# Altium PCB PC-104 16 bit bus.PCBDOC
Units mm, origin at the board's own origin, x right, y up, seen from the top; angles counter-clockwise.
Board outline 90.17 x 95.88 mm, 10 copper layers (TopLayer, MidLayer1, MidLayer2, MidLayer3, MidLayer4, MidLayer5, MidLayer6, MidLayer7, MidLayer8, BottomLayer); 2 components, 1 nets, 108 pads, 0 vias.
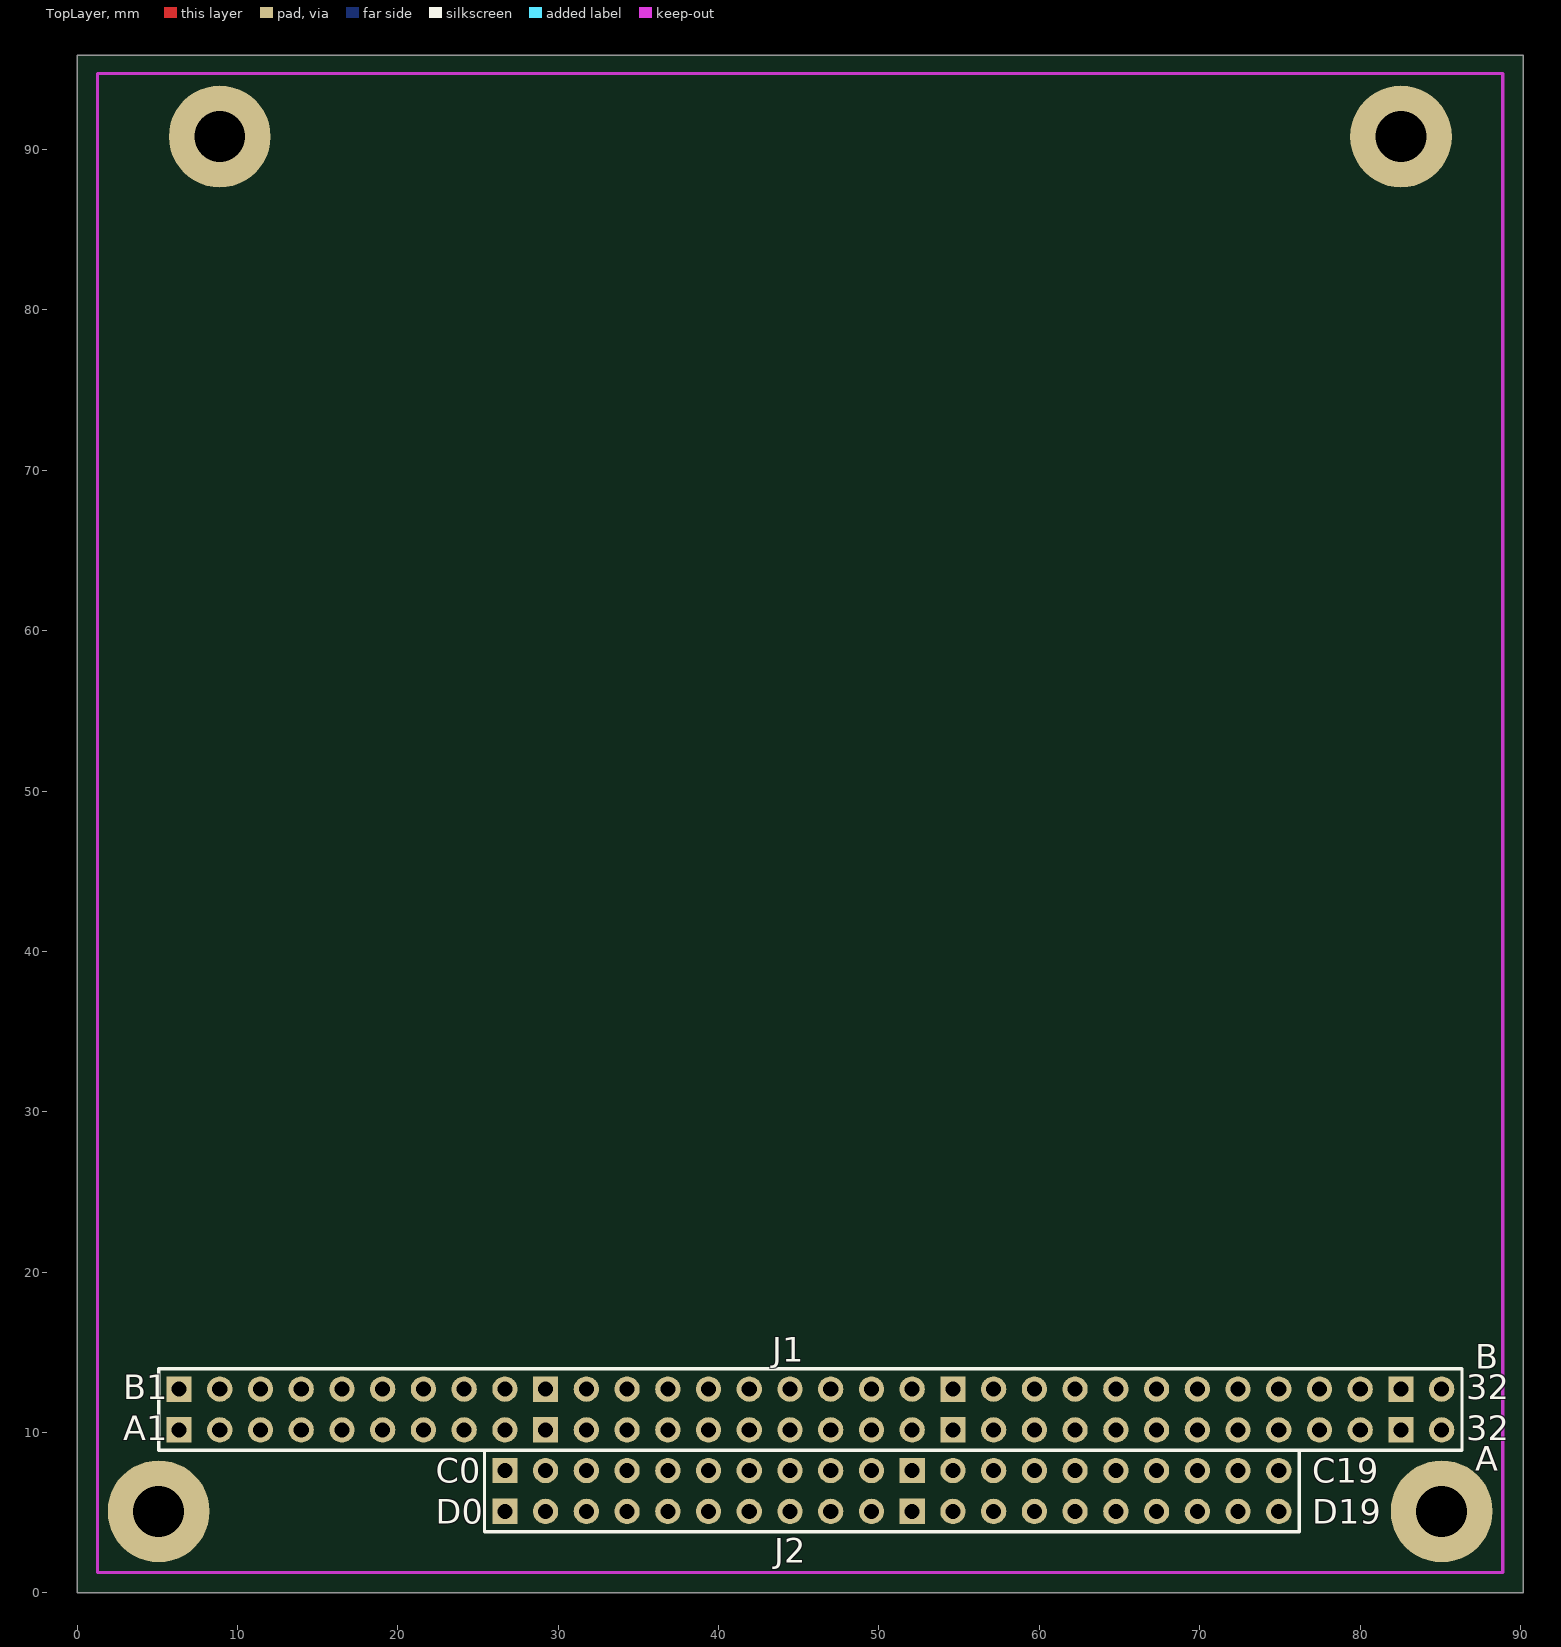
[diagram p0: TopLayer view]
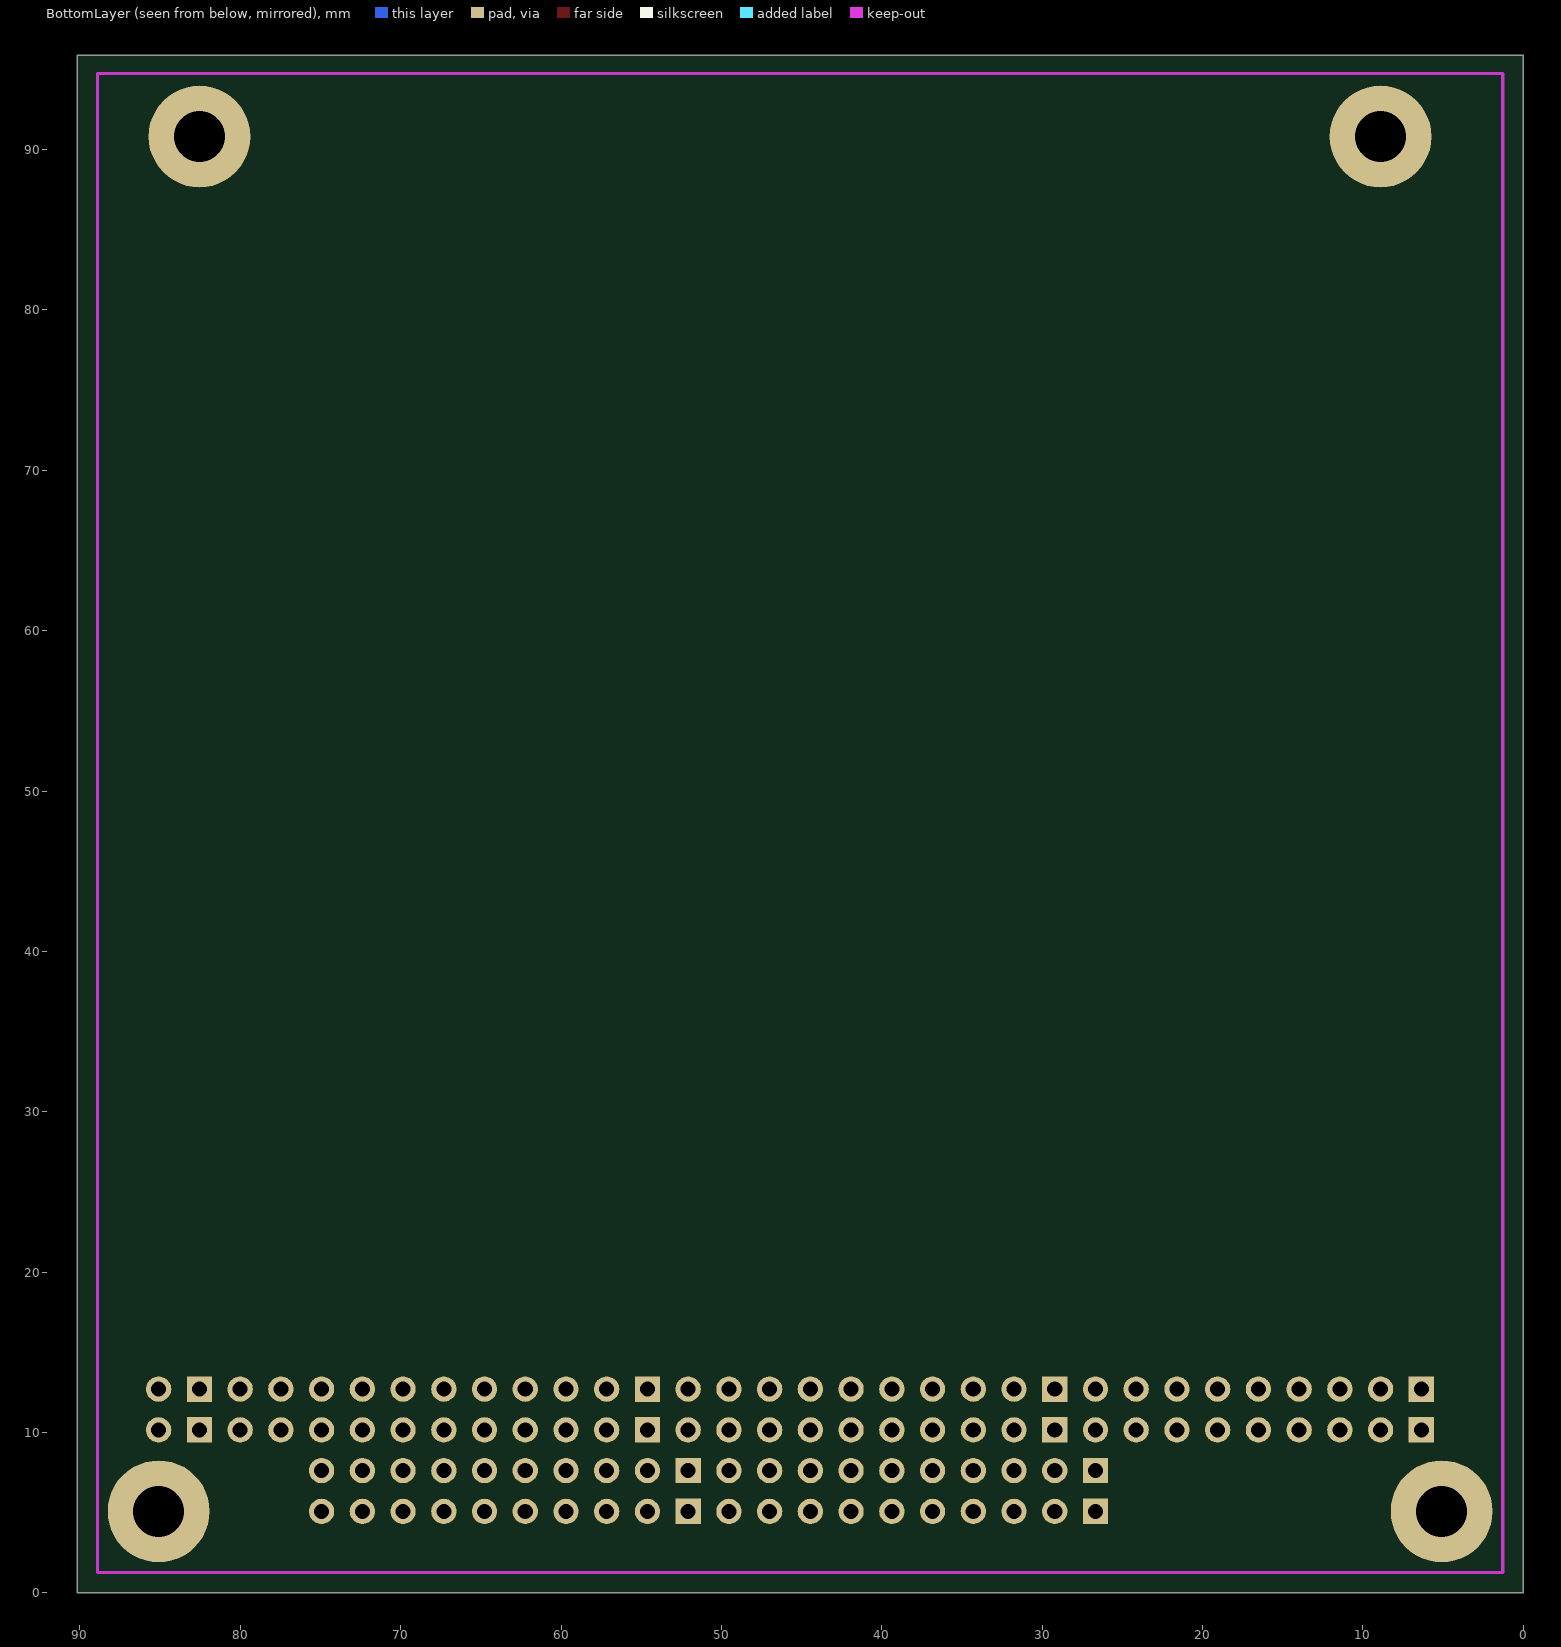
[diagram p1: BottomLayer view, seen from below]
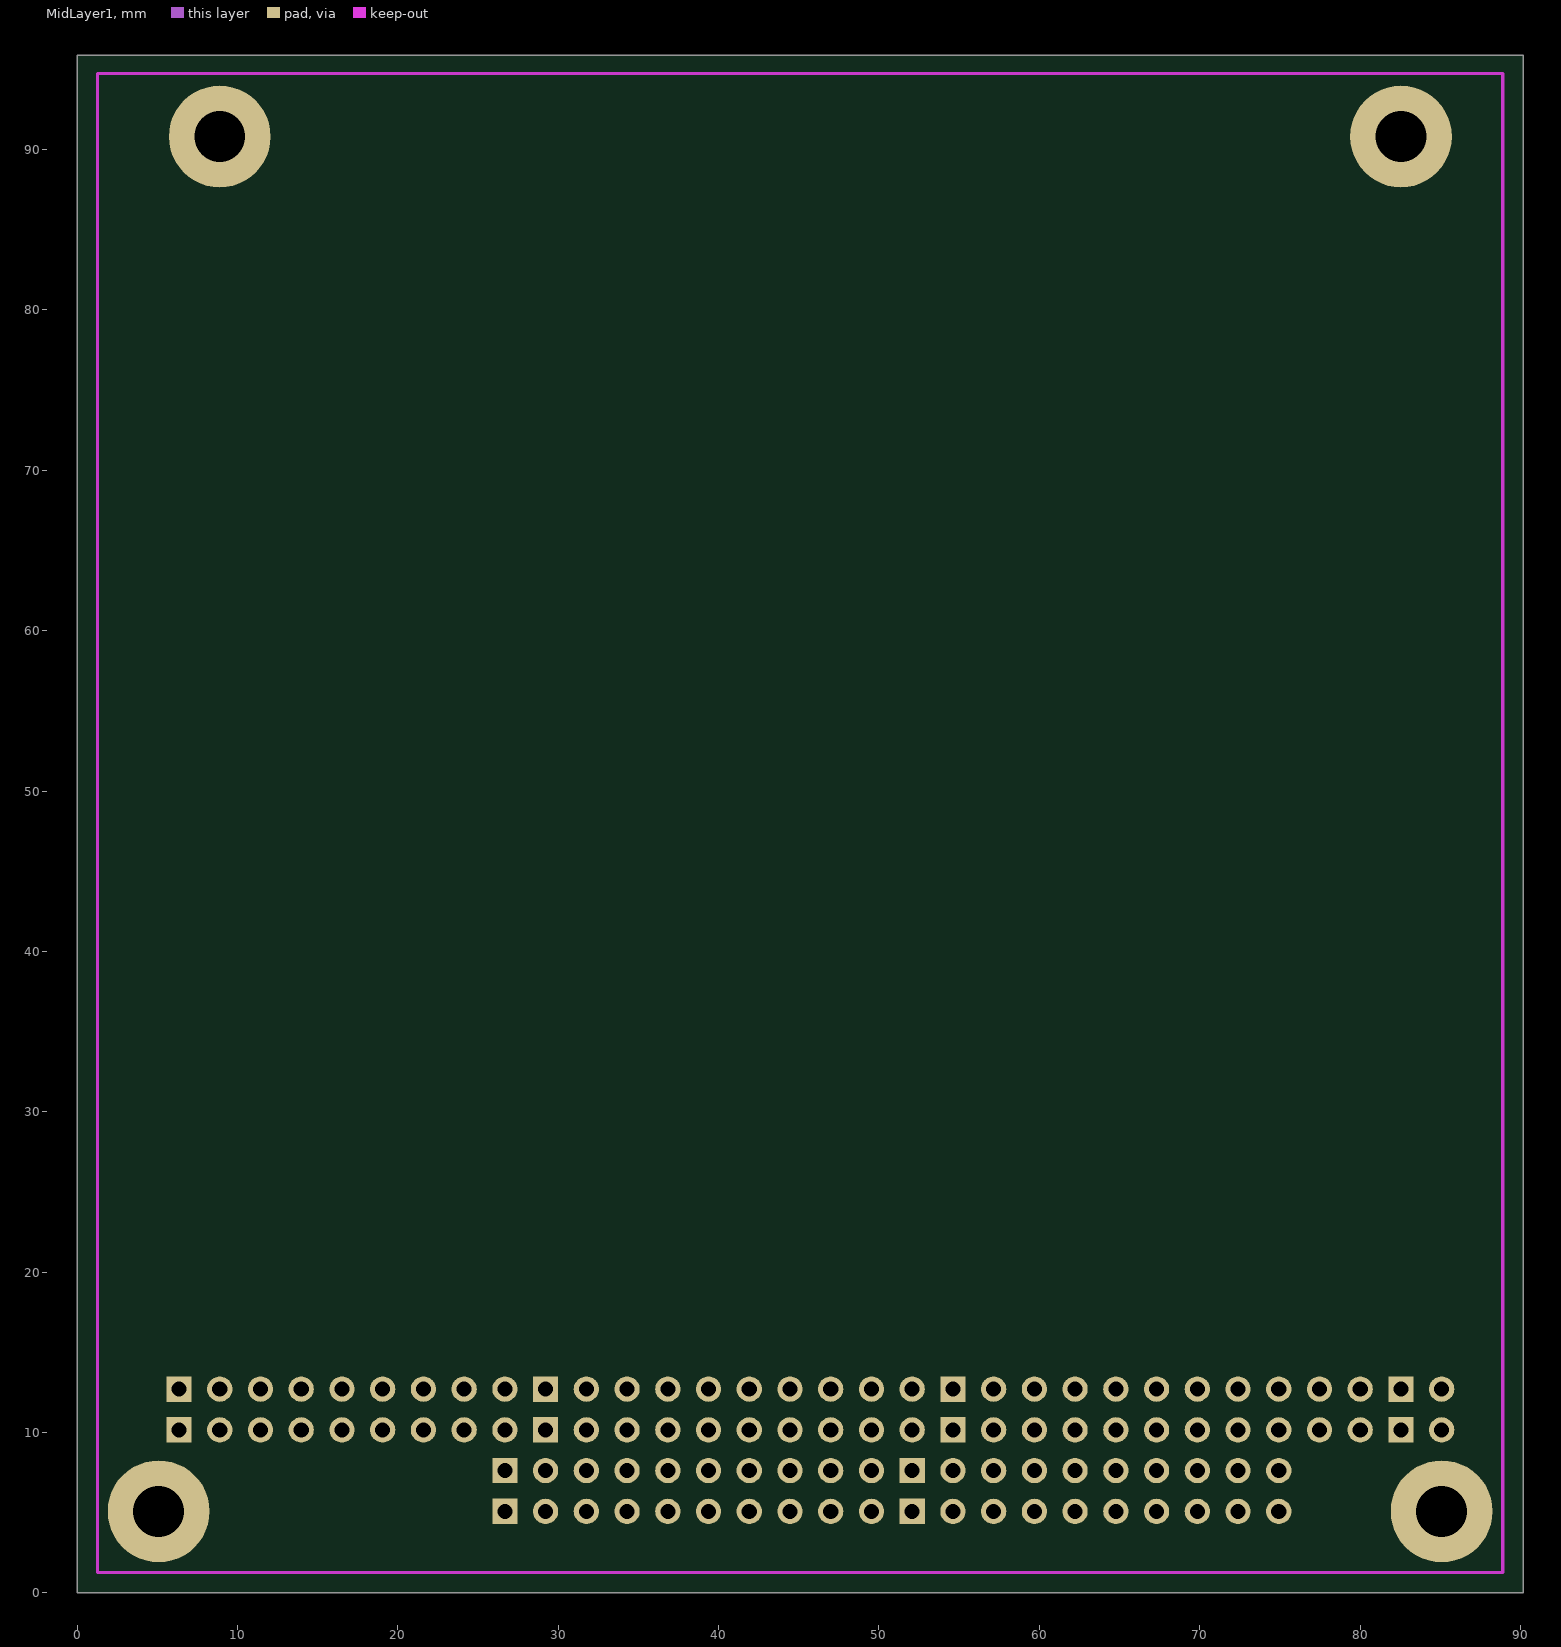
[diagram p2: MidLayer1]
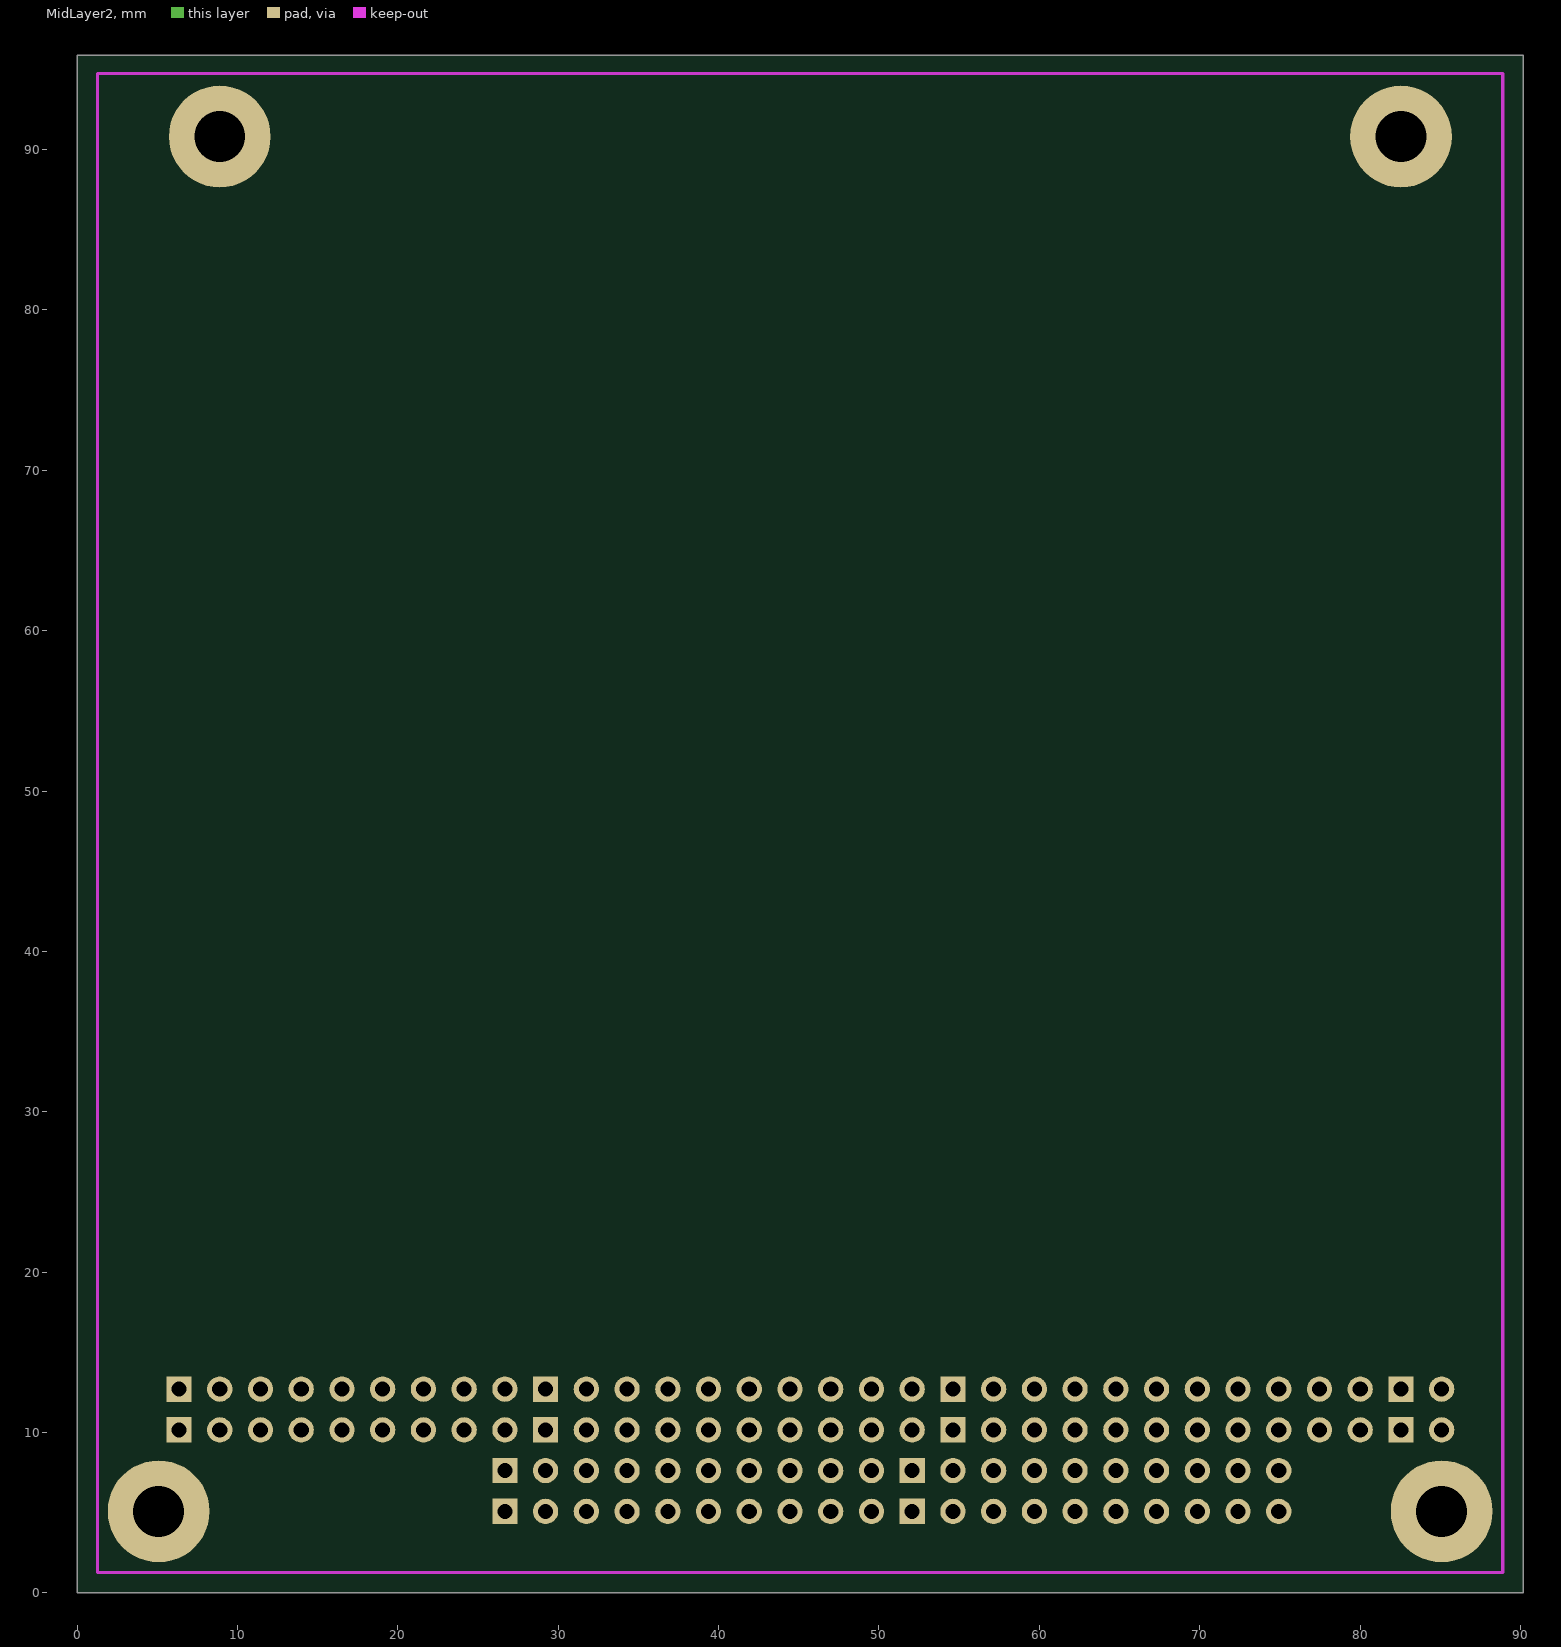
[diagram p3: MidLayer2]
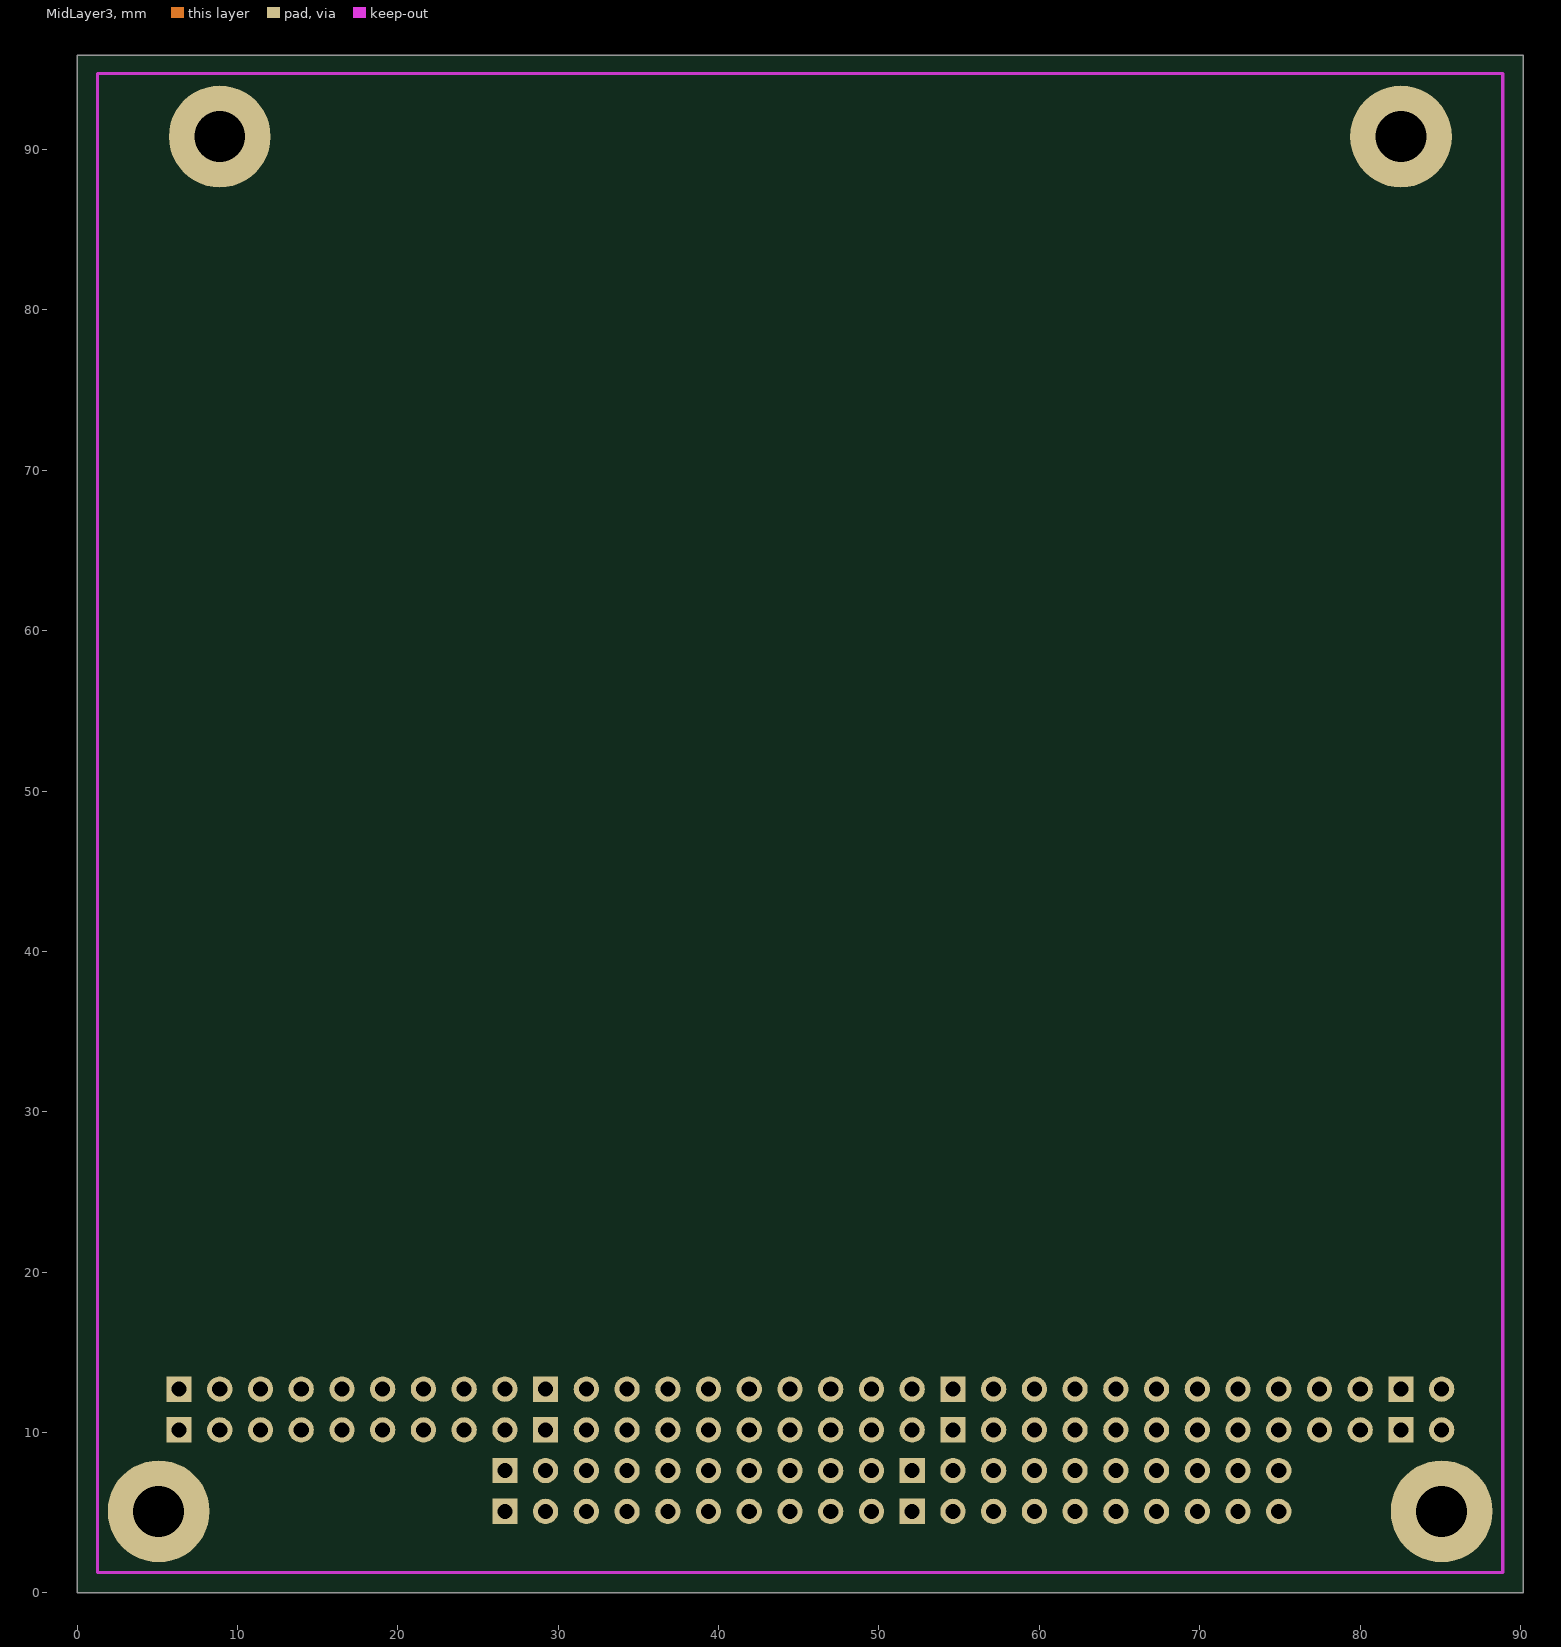
[diagram p4: MidLayer3]
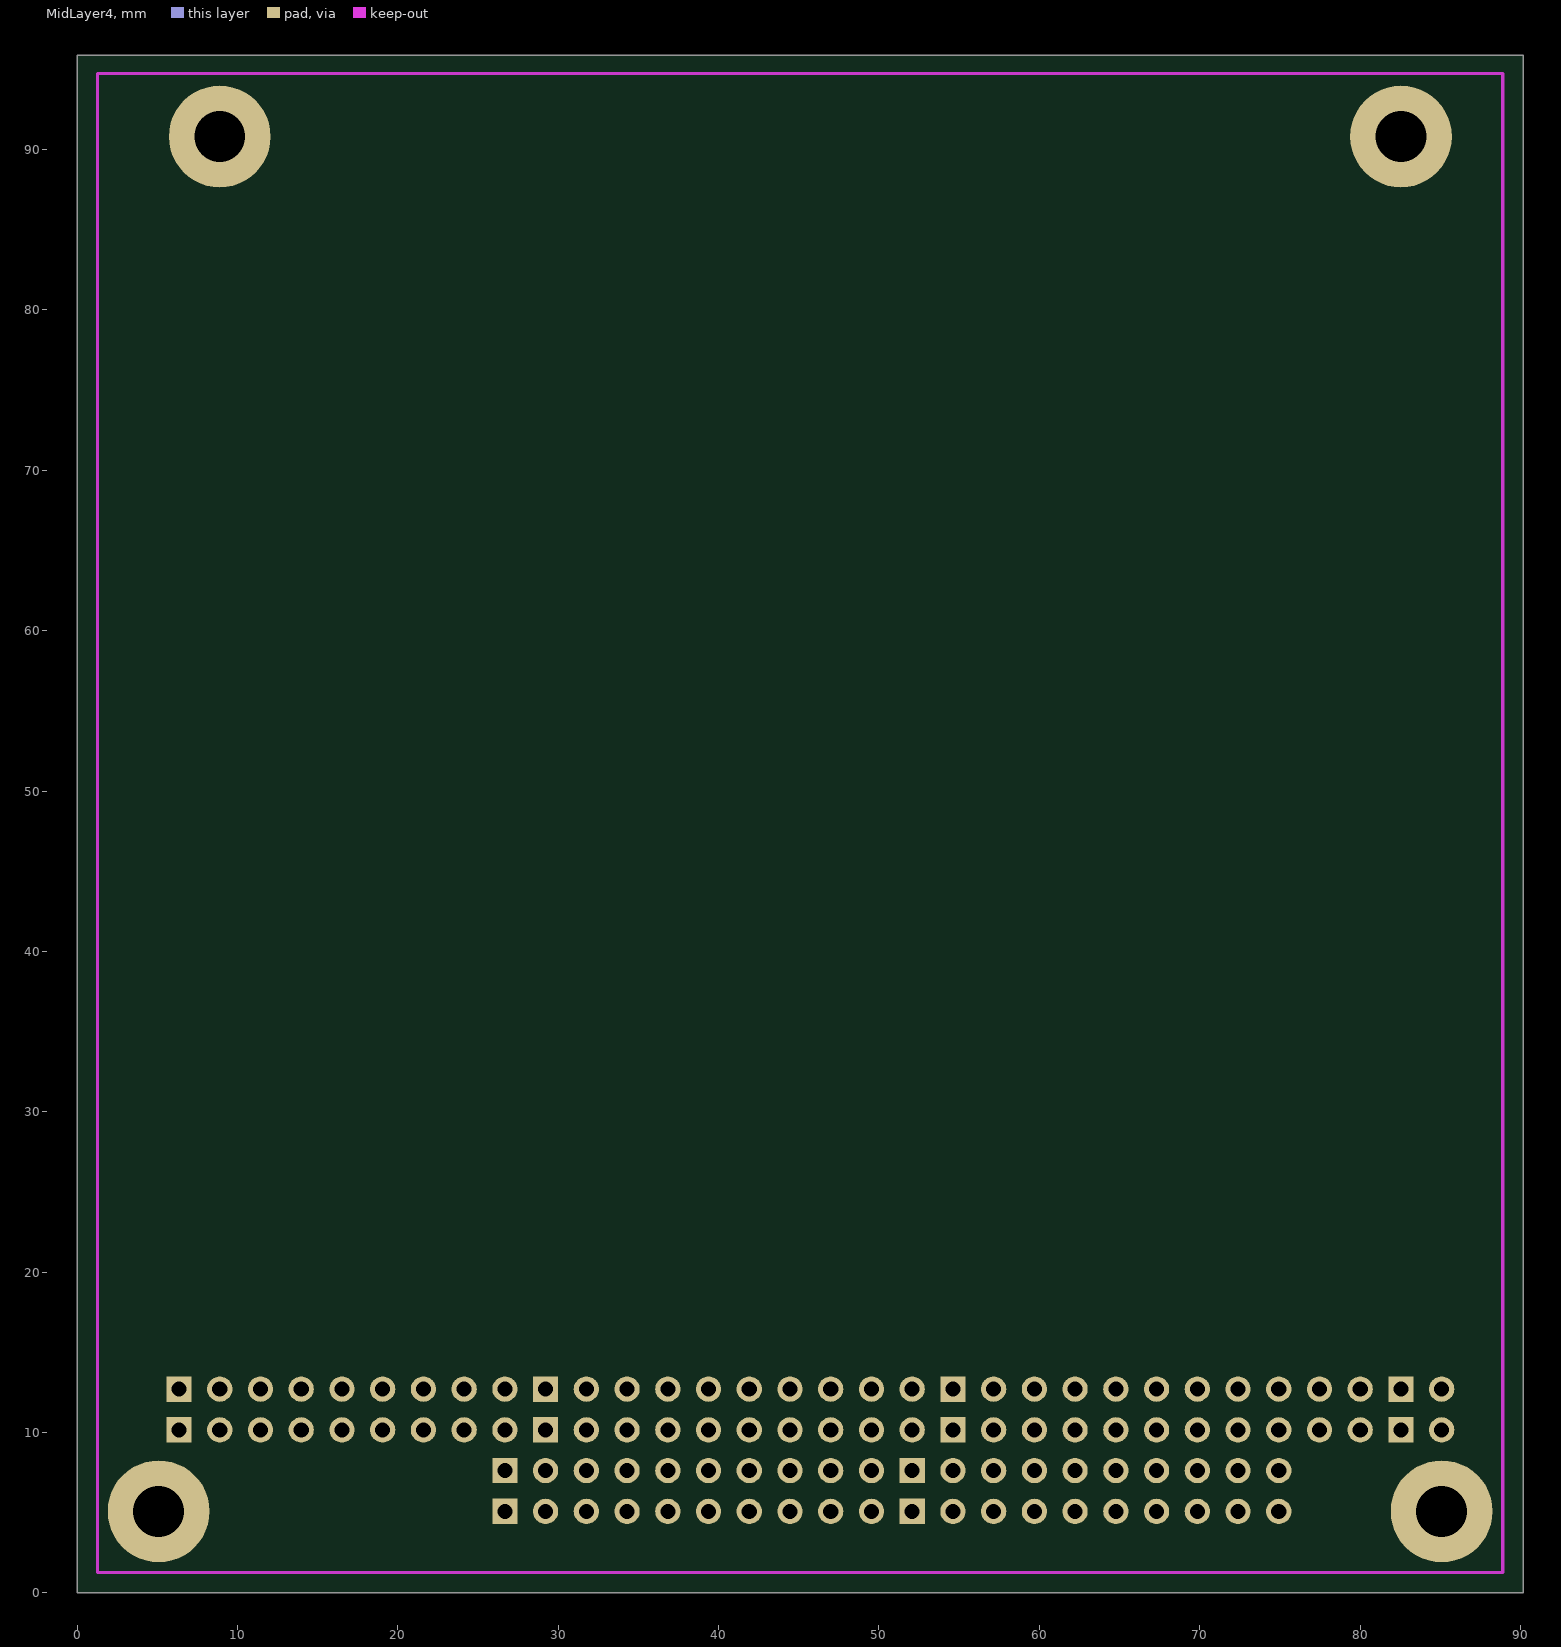
[diagram p5: MidLayer4]
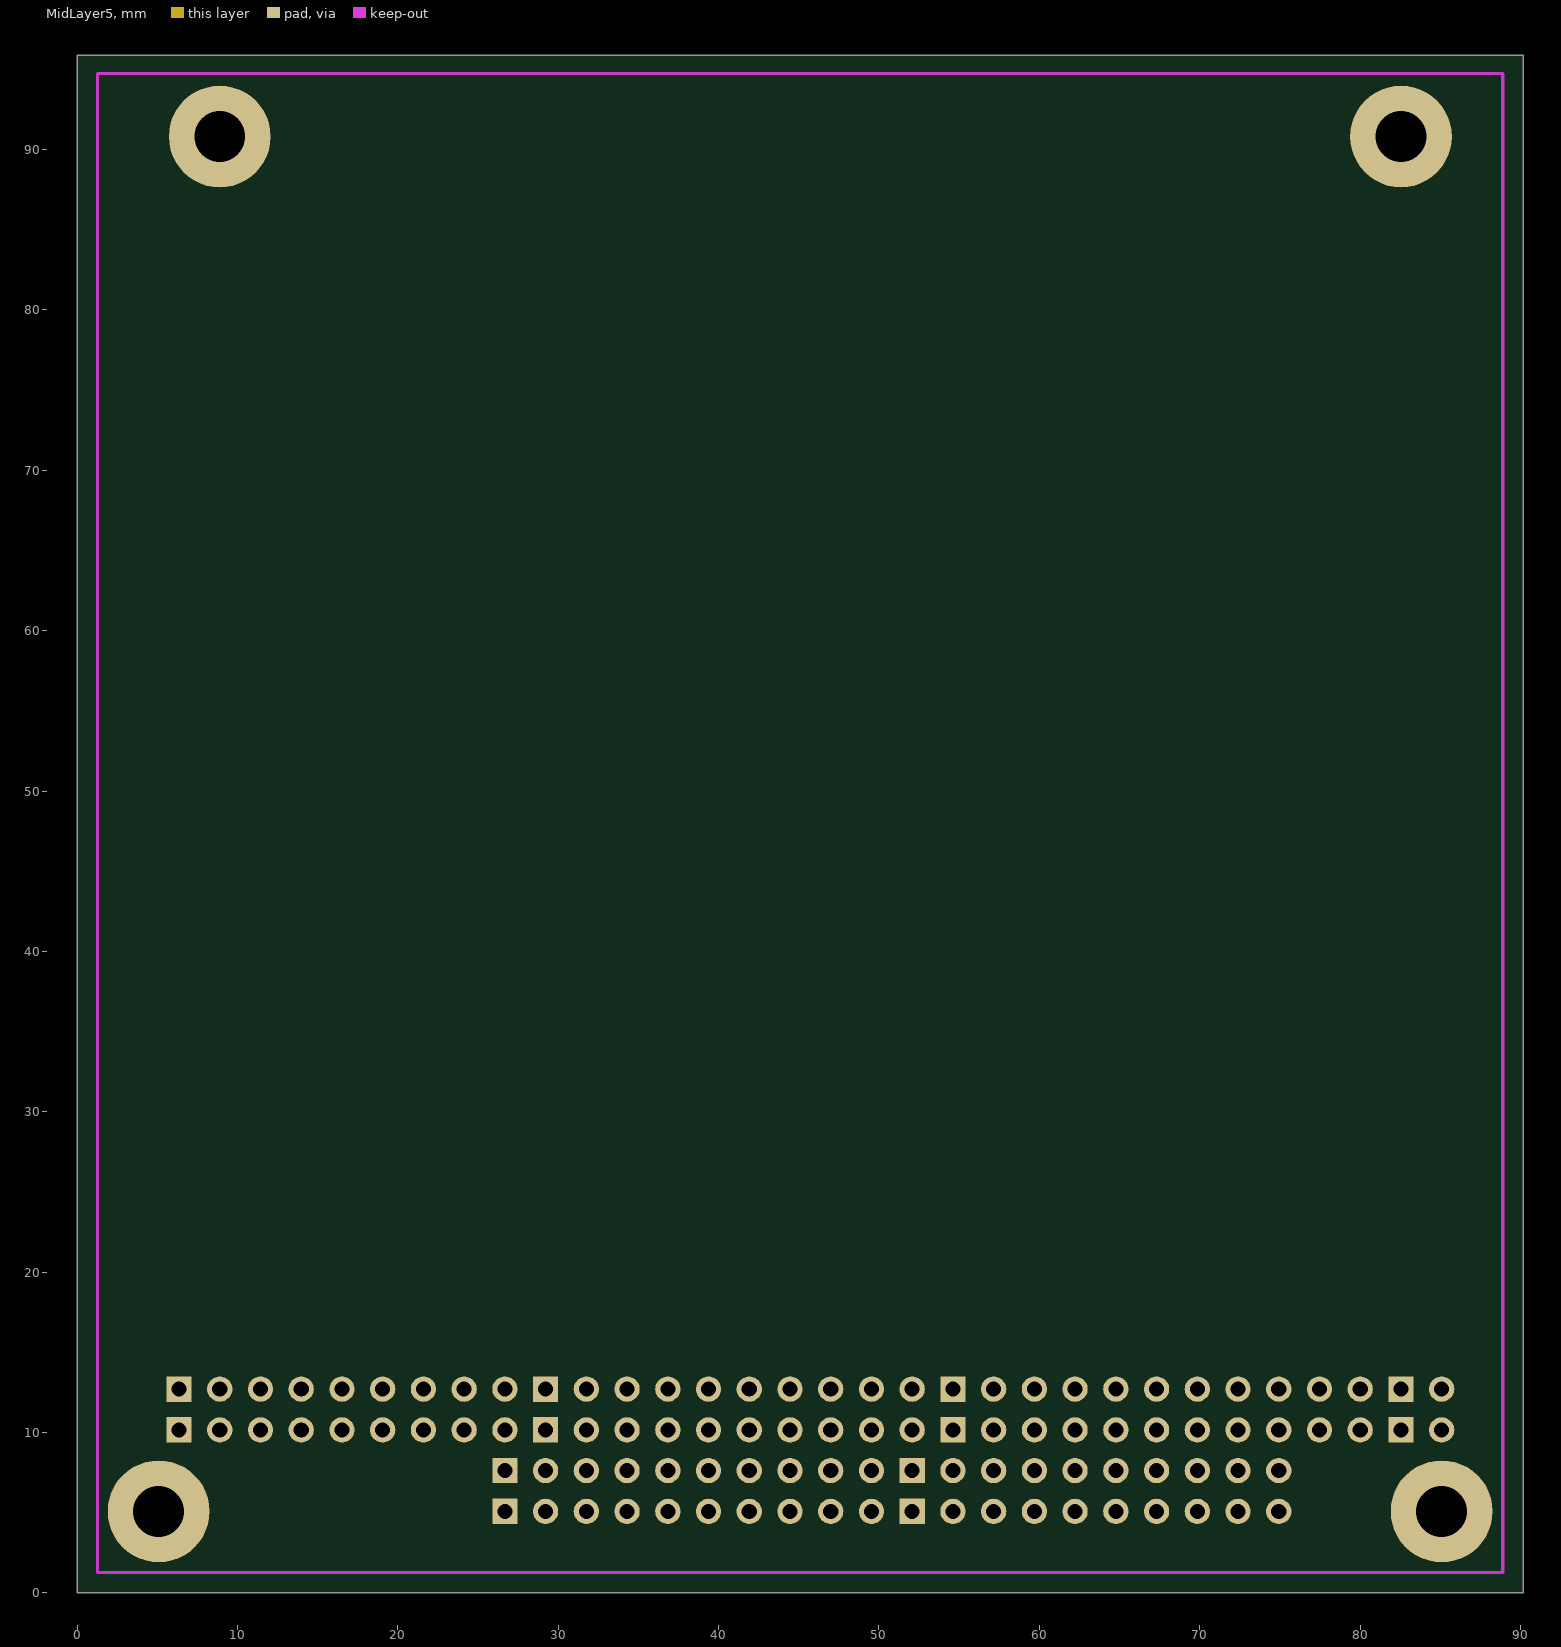
[diagram p6: MidLayer5]
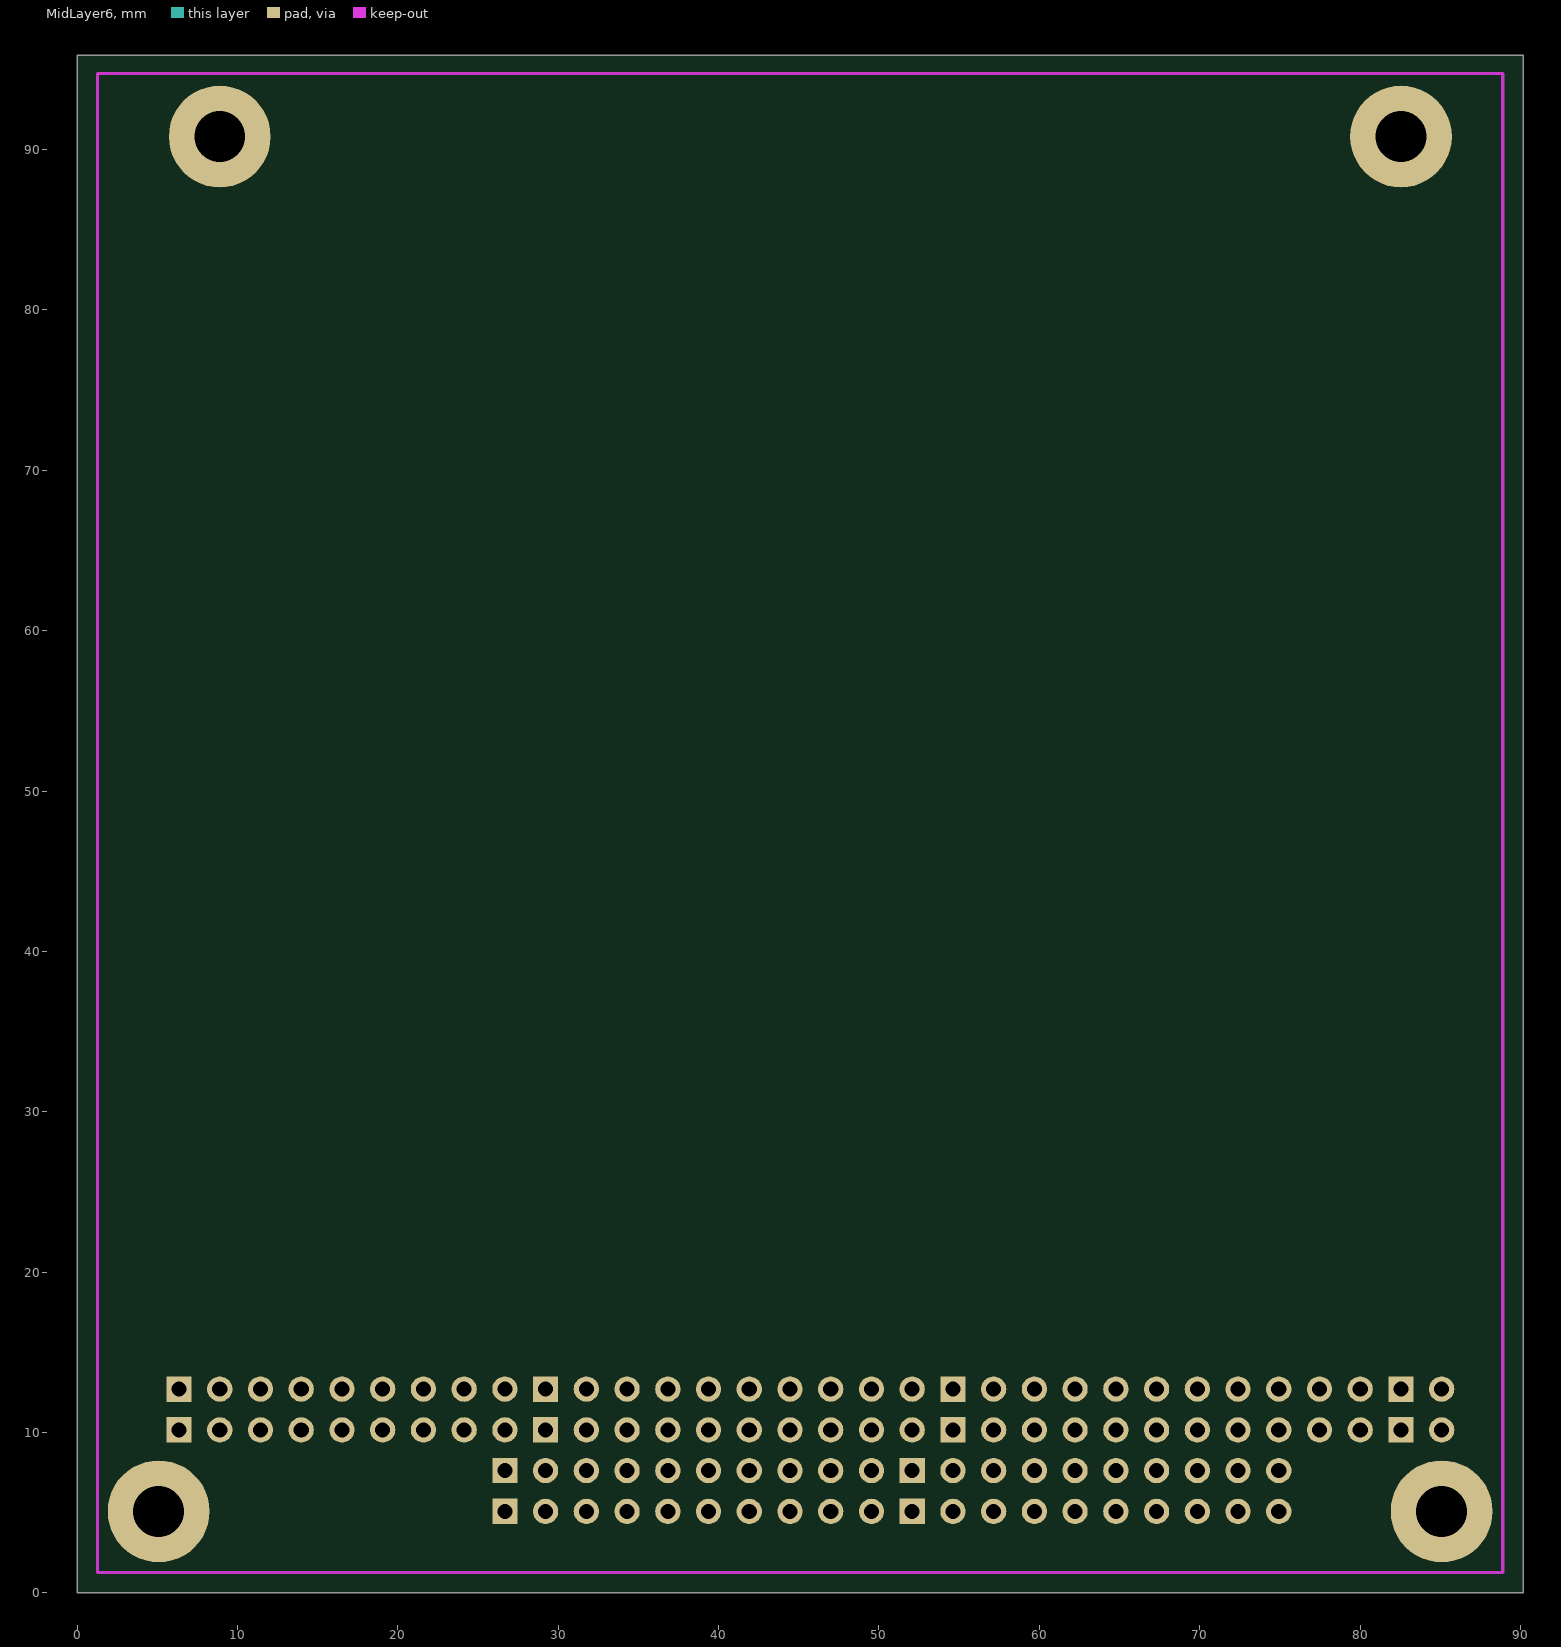
[diagram p7: MidLayer6]
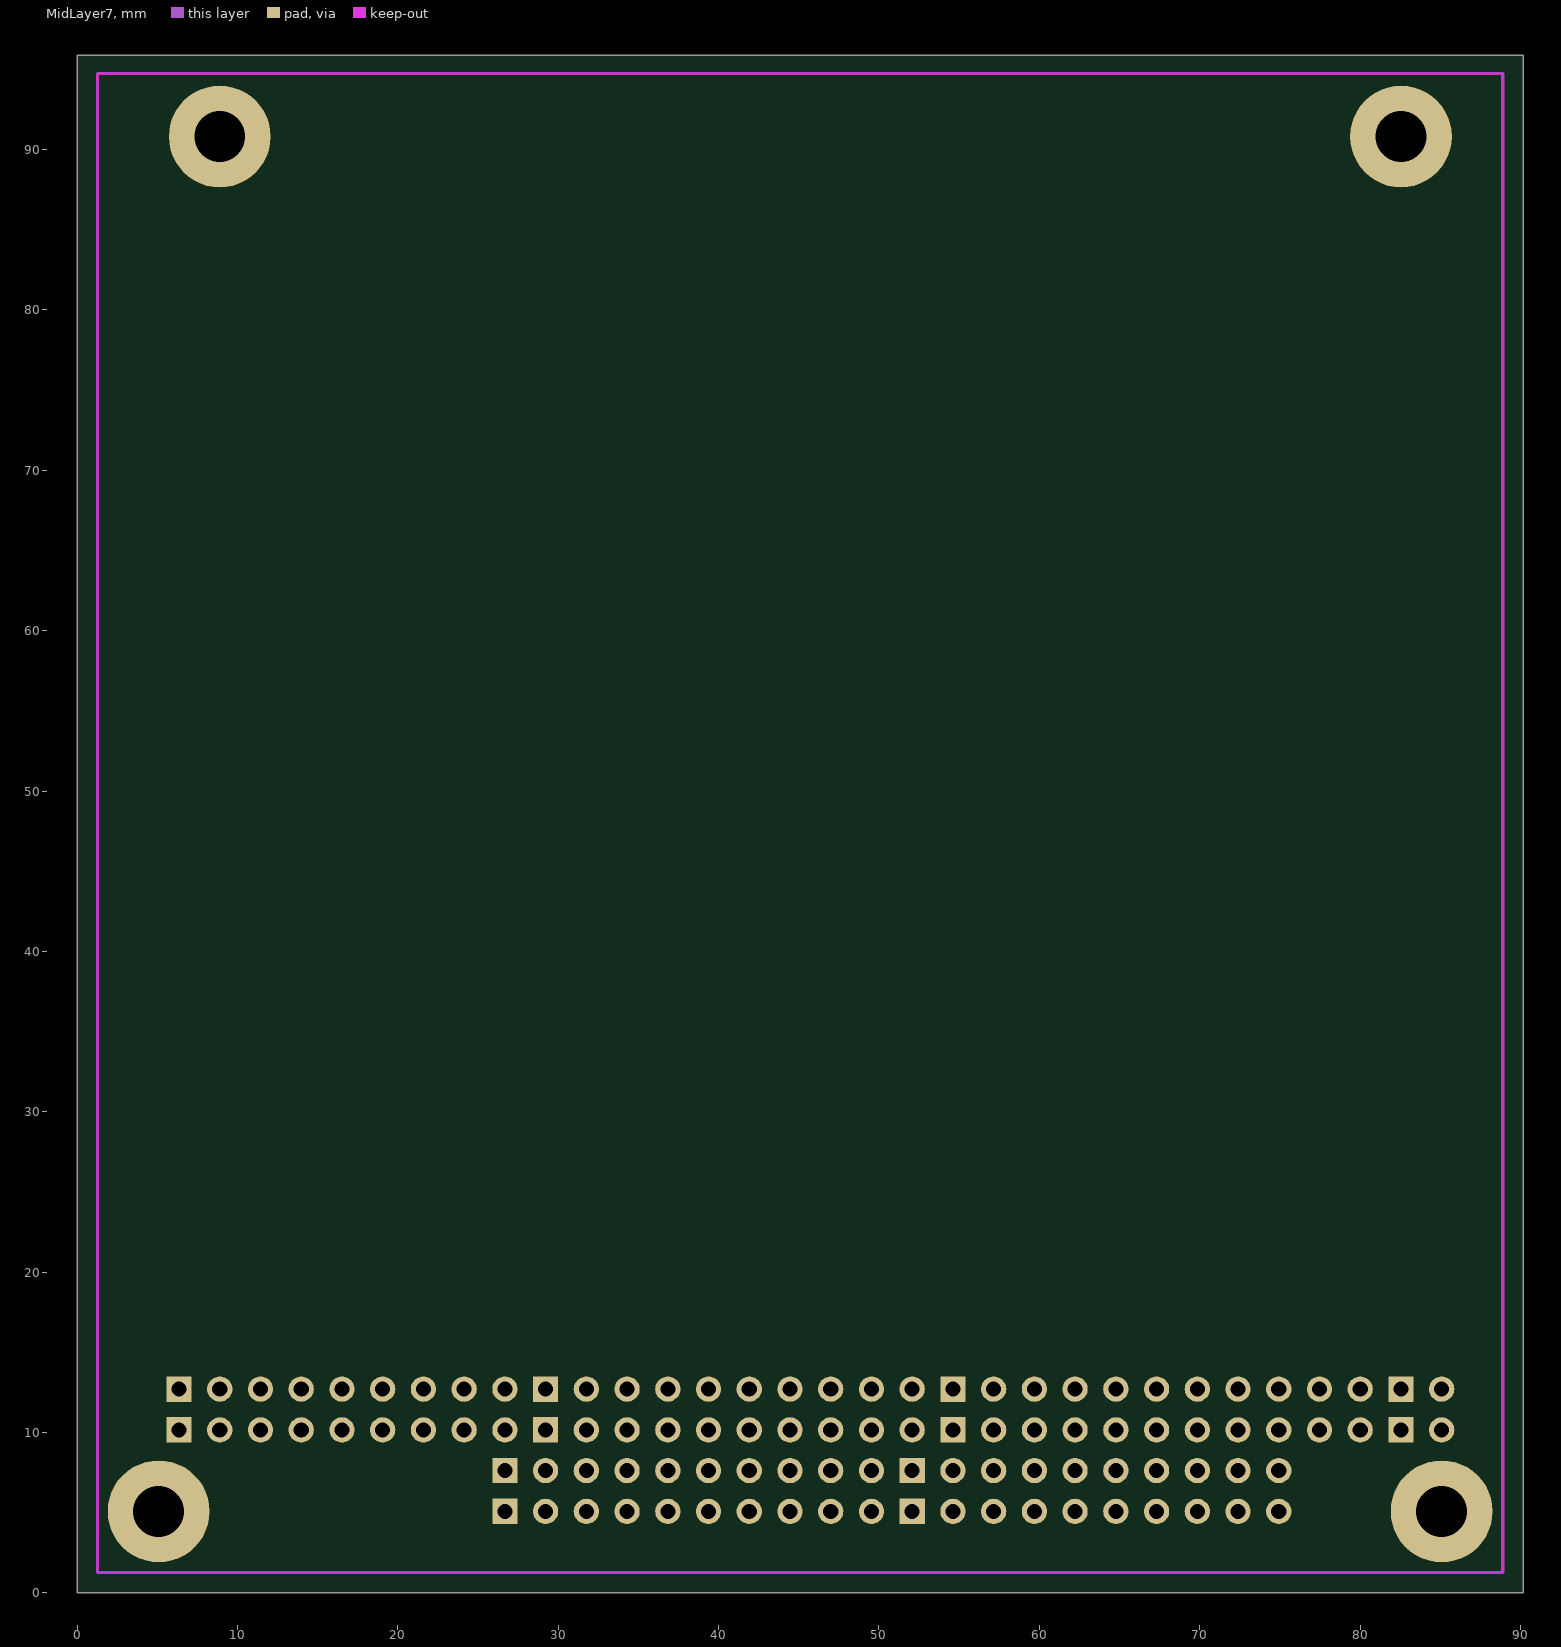
[diagram p8: MidLayer7]
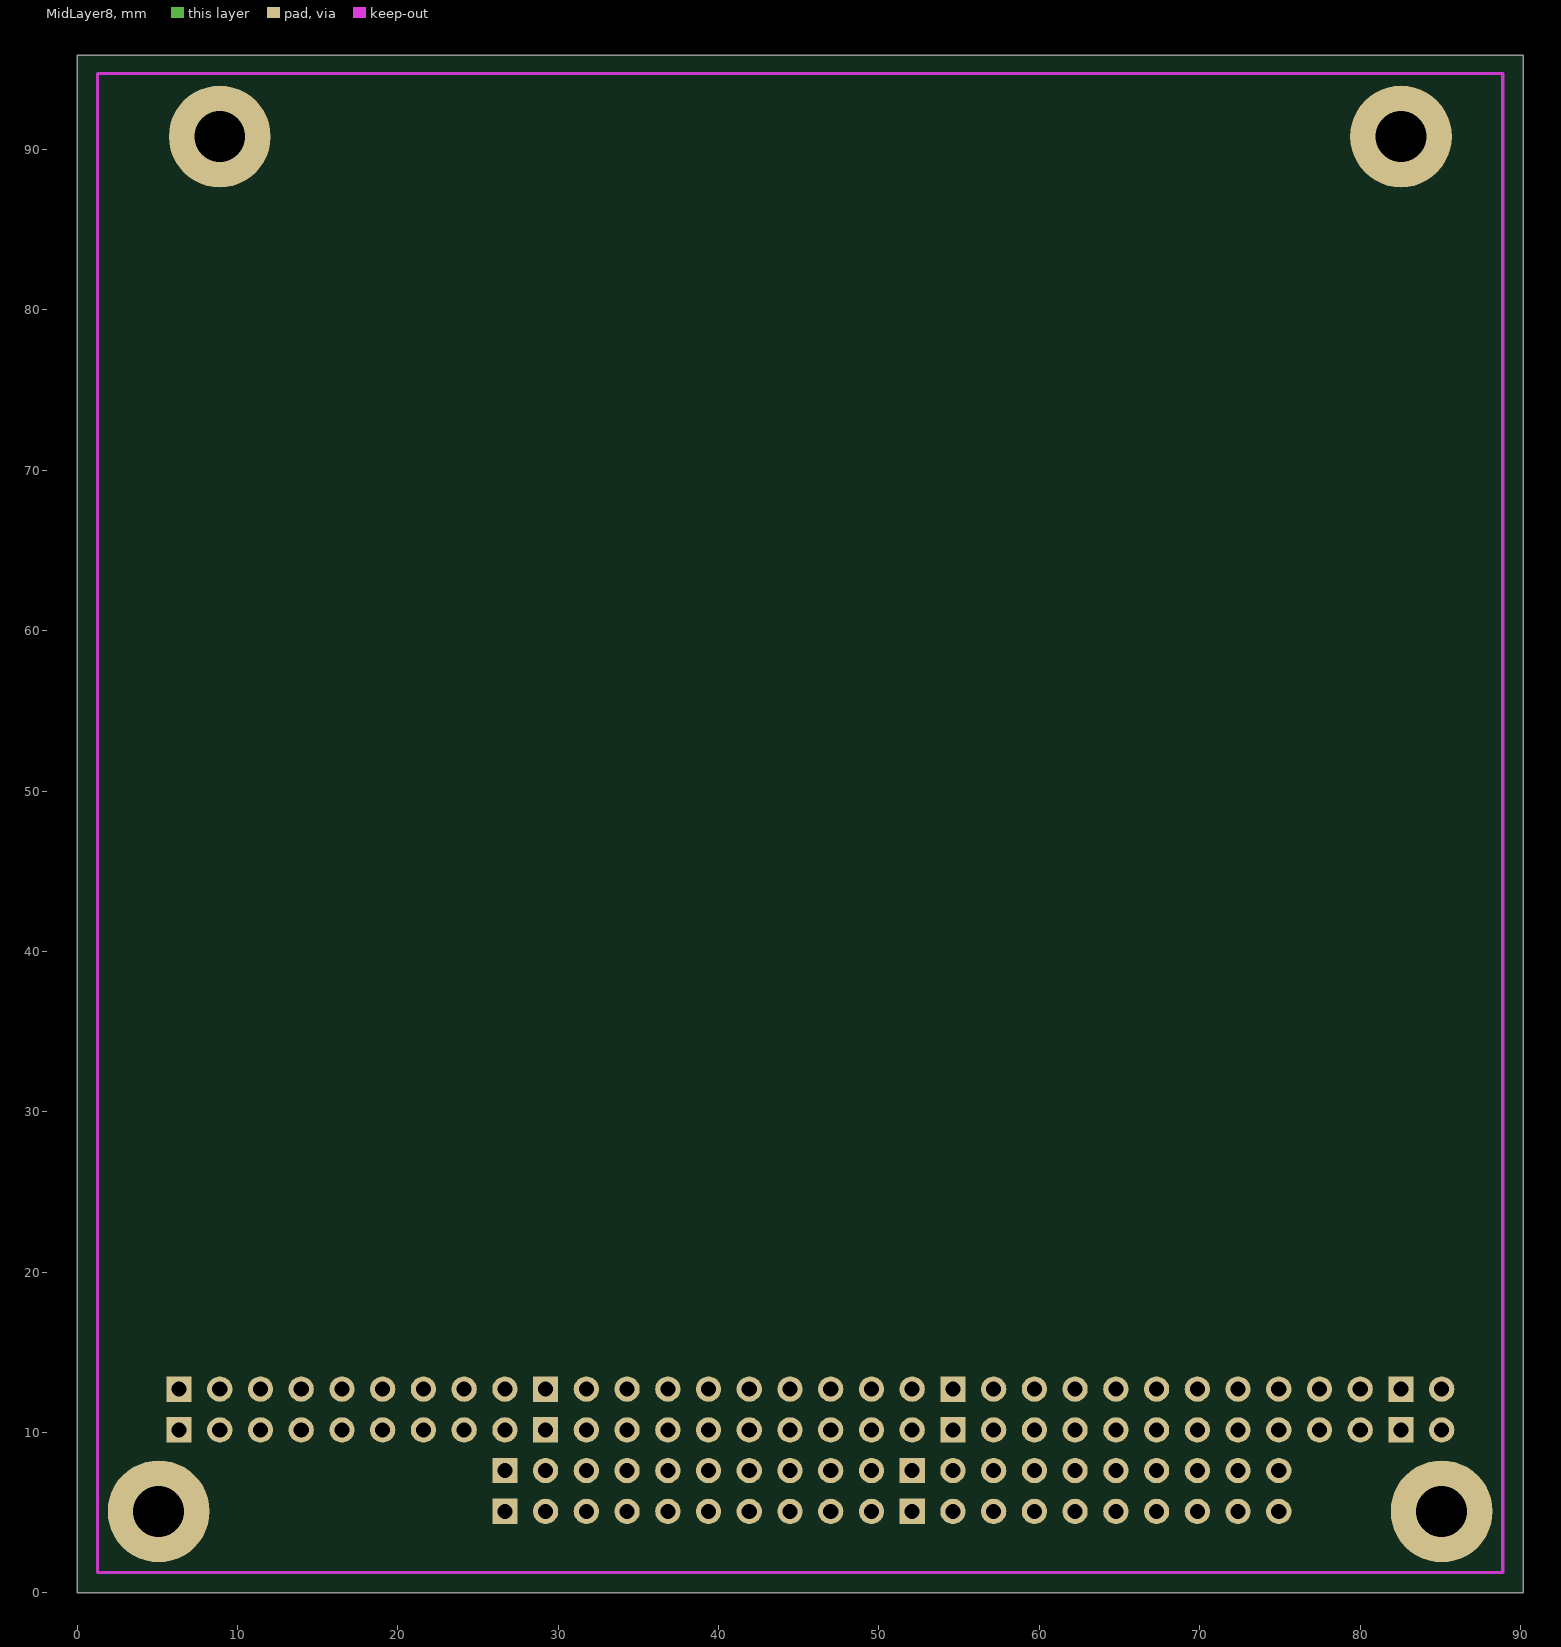
[diagram p9: MidLayer8]

## Layer stack, top to bottom
TopSolder: solder mask 0.0102, Solder Resist, Dk 3.5
TopLayer: signal copper 0.0356
Dielectric1: core 0.32, FR-4, Dk 4.8
MidLayer1: signal copper 0.0356
Dielectric2: prepreg 0.32, FR-4, Dk 4.8
MidLayer2: signal copper 0.0356
Dielectric3: core 0.32, FR-4, Dk 4.8
MidLayer3: signal copper 0.0356
Dielectric4: prepreg 0.32, FR-4, Dk 4.8
MidLayer4: signal copper 0.0356
Dielectric5: core 0.32, FR-4, Dk 4.8
MidLayer5: signal copper 0.0356
Dielectric6: prepreg 0.32, FR-4, Dk 4.8
MidLayer6: signal copper 0.0356
Dielectric7: core 0.32, FR-4, Dk 4.8
MidLayer7: signal copper 0.0356
Dielectric8: prepreg 0.32, FR-4, Dk 4.8
MidLayer8: signal copper 0.0356
Dielectric9: core 0.32, FR-4, Dk 4.8
BottomLayer: signal copper 0.0356
BottomSolder: solder mask 0.0102, Solder Resist, Dk 3.5

## Board outline
0,0 90.17,0 90.17,95.885 0,95.885

## Design rules (kind name [scope] priority, off if disabled: settings)
Clearance [All] p1: gap=0.254
FabricationTestPointUsage TestPointUsage [All] p1: valid=0 allowmultiple=FALSE
FabricationTestpoint Testpoint [All] p1: side=3 testpointundercomponent=TRUE minsize=1.016 maxsize=2.54 preferedsize=1.524 minholesize=0.508 maxholesize=1.016 preferedholesize=0.813 testpointgrid=0.025 allowsidetop=TRUE allowsidebottom=TRUE usegrid=TRUE gridtolerance=0
PlaneClearance [All] p1: clearance=0
PolygonConnect [All] p1: connectstyle=Relief reliefconductorwidth=0.254 reliefentries=4 polygonreliefangle="90 Angle" airgapwidth=0.254
RoutingVias [All] p1: holewidth=0.508 width=1.27 viastyle="Through Hole" minholewidth=0.711 minwidth=1.27 maxholewidth=0.711 maxwidth=1.27
SilkToSolderMaskClearance SilkscreenOverComponentPads [IsPad] p1: minsilkscreentomaskgap=0.254 clearancetoexposedcopper=TRUE
SolderMaskExpansion [All] p1: expansion=0.102
Width [All] p1: maxlimit=0.254 minlimit=0.254 preferedwidth=0.254
25 further rules are at their usual default settings.

## Components (designator, comment, footprint, x,y, rotation, side; value= is the part's Value field where it differs from the comment)
J1 "" PC104AB 6.35,10.16 r0 top locked
J2 "" PC104CD 26.67,7.62 r0 top locked

## Footprints (in the part's own frame and the unit in brackets; to place one, negate y for a bottom-side part, rotate by r counter-clockwise, add the part's x,y. Pads: shape width x height; smd on the part's side, far side on the other; paste and mask are expansions set on the pad)
PC104AB [mil]
  rect 62x62 hole 37: A1(0,0) A10(900,0) A20(1900,0) A31(3000,0) B1(0,100) B10(900,100) B20(1900,100) B31(3000,100)
  round 62 hole 37: A2(100,0) A3(200,0) A4(300,0) A5(400,0) A6(500,0) A7(600,0) A8(700,0) A9(800,0) A11(1000,0) A12(1100,0) A13(1200,0) A14(1300,0) A15(1400,0) A16(1500,0) A17(1600,0) A18(1700,0) A19(1800,0) A21(2000,0) A22(2100,0) A23(2200,0) A24(2300,0) A25(2400,0) A26(2500,0) A27(2600,0) A28(2700,0) A29(2800,0) A30(2900,0) A32(3100,0) B2(100,100) B3(200,100) B4(300,100) B5(400,100) B6(500,100) B7(600,100) B8(700,100) B9(800,100) B11(1000,100) B12(1100,100) B13(1200,100) B14(1300,100) B15(1400,100) B16(1500,100) B17(1600,100) B18(1700,100) B19(1800,100) B21(2000,100) B22(2100,100) B23(2200,100) B24(2300,100) B25(2400,100) B26(2500,100) B27(2600,100) B28(2700,100) B29(2800,100) B30(2900,100) B32(3100,100)
  silkscreen extent -50,-50 3150,150
PC104CD [mil]
  rect 62x62 hole 37: C0(0,0) C10(1000,0) D0(0,-100) D10(1000,-100)
  round 62 hole 37: C1(100,0) C2(200,0) C3(300,0) C4(400,0) C5(500,0) C6(600,0) C7(700,0) C8(800,0) C9(900,0) C11(1100,0) C12(1200,0) C13(1300,0) C14(1400,0) C15(1500,0) C16(1600,0) C17(1700,0) C18(1800,0) C19(1900,0) D1(100,-100) D2(200,-100) D3(300,-100) D4(400,-100) D5(500,-100) D6(600,-100) D7(700,-100) D8(800,-100) D9(900,-100) D11(1100,-100) D12(1200,-100) D13(1300,-100) D14(1400,-100) D15(1500,-100) D16(1600,-100) D17(1700,-100) D18(1800,-100) D19(1900,-100)
  silkscreen extent -50,-150 1950,50

## Free pads (board coordinates)
  round 6.35 hole 3.175: 1(5.08,5.08) 2(82.55,90.81) 3(85.09,5.08) 4(8.89,90.81)

## Nets (pads, with @x,y where several pads share a name; then routed paths per layer and width w, separated by ;. In a path a pad name is that pad's centre, name@x,y a point inside that pad or via, vN(x,y) a via of type N, cw(c..) or ccw(c..) an arc to the next point about the centre after c; other vN are vias at no path point)
"": 
pads on no net: J1.A1 J1.A2 J1.A3 J1.A4 J1.A5 J1.A6 J1.A7 J1.A8 J1.A9 J1.A10 J1.A11 J1.A12 J1.A13 J1.A14 J1.A15 J1.A16 J1.A17 J1.A18 J1.A19 J1.A20 J1.A21 J1.A22 J1.A23 J1.A24 J1.A25 J1.A26 J1.A27 J1.A28 J1.A29 J1.A30 J1.A31 J1.A32 J1.B1 J1.B2 J1.B3 J1.B4 J1.B5 J1.B6 J1.B7 J1.B8 J1.B9 J1.B10 J1.B11 J1.B12 J1.B13 J1.B14 J1.B15 J1.B16 J1.B17 J1.B18 J1.B19 J1.B20 J1.B21 J1.B22 J1.B23 J1.B24 J1.B25 J1.B26 J1.B27 J1.B28 J1.B29 J1.B30 J1.B31 J1.B32 J2.C0 J2.C1 J2.C2 J2.C3 J2.C4 J2.C5 J2.C6 J2.C7 J2.C8 J2.C9 J2.C10 J2.C11 J2.C12 J2.C13 J2.C14 J2.C15 J2.C16 J2.C17 J2.C18 J2.C19 J2.D0 J2.D1 J2.D2 J2.D3 J2.D4 J2.D5 J2.D6 J2.D7 J2.D8 J2.D9 J2.D10 J2.D11 J2.D12 J2.D13 J2.D14 J2.D15 J2.D16 J2.D17 J2.D18 J2.D19

## Keep-outs
KeepOutLayer:
  lines w0.203: 1.27,1.27 88.9,1.27 88.9,94.742 1.27,94.742 1.27,1.27

## Other copper
TopLayer:
  text ".GTL" at 82.042,99.263 h2.29
MidLayer1:
  text ".G1" at 82.042,99.263 h2.29
MidLayer2:
  text ".G2" at 82.042,99.263 h2.29
MidLayer3:
  text ".G3" at 82.042,99.263 h2.29
MidLayer4:
  text ".G4" at 82.042,99.263 h2.29
MidLayer5:
  text ".G5" at 82.042,99.263 h2.29
MidLayer6:
  text ".G6" at 82.042,99.263 h2.29
MidLayer7:
  text ".G7" at 82.042,99.263 h2.29
MidLayer8:
  text ".G8" at 82.042,99.263 h2.29
BottomLayer:
  text "P/N XXXXXX-XXX REV A" at 33.528,107.645 h1.91
  text ".GBL" at 82.042,99.263 h2.29

## Silkscreen, mask and mechanical layers (free items; w line width, h text height)
TopOverlay:
  rectangle: 7.137,112.801 26.187,117.881
  rectangle: 7.137,120.167 26.187,125.247
  lines w0.254: 35.372,122.783 ccw(c36.601,123.787) 35.375,122.779
  text "C" at 37.998,122.834 h1.52
  text "2002 COMPANY NAME" at 41.808,122.834 h1.91
  text "S/N" at 0.787,121.628 h1.91
  text "BOARD NAME" at 37.998,118.389 h1.91
  text "ASSY NO.: XXXXXX" at 37.998,114.579 h1.91
  text "REV" at 0.787,114.071 h1.91
  text ".GTO" at 82.042,99.263 h2.29
TopPaste:
  text ".GTP" at 82.042,99.263 h2.29
BottomPaste:
  text ".GBP" at 82.042,99.263 h2.29
TopSolder:
  text ".GTS" at 82.042,99.263 h2.29
BottomSolder:
  text ".GBS" at 82.042,99.263 h2.29
Mechanical1:
  the board outline again, w0.203
Mechanical4:
  text ".Pcb_File_Name_No_Path" at 33.782,104.089 h2.29
  text ".Printout_Name" at 33.782,99.771 h2.29
DrillDrawing:
  text ".LEGEND" at 98.933,5.588 h2.29
  text "Drilling Details." at 98.933,1.778 h2.29

## Dimensions
0,0 to 0,95.885 on MultiLayer
-0.508,5.08 to 0,0 on Mechanical4
5.08,-0.508 to 0,0 on Mechanical4

## Text inside footprints (layer, text, board x,y; h text height)
J1: TopOverlay "B" at 87.186,13.97 h1.52; TopOverlay "A" at 87.186,7.62 h1.52; TopOverlay "32" at 86.614,12.065 h1.52; TopOverlay "32" at 86.614,9.525 h1.52; TopOverlay "A1" at 2.858,9.525 h1.52; TopOverlay "B1" at 2.858,12.065 h1.52
J2: TopOverlay "D19" at 77.026,4.318 h1.52; TopOverlay "C19" at 77.026,6.858 h1.52; TopOverlay "D0" at 22.352,4.318 h1.52; TopOverlay "C0" at 22.352,6.858 h1.52